# EAGLE board reveller-pi (EAGLE 7.5.0)
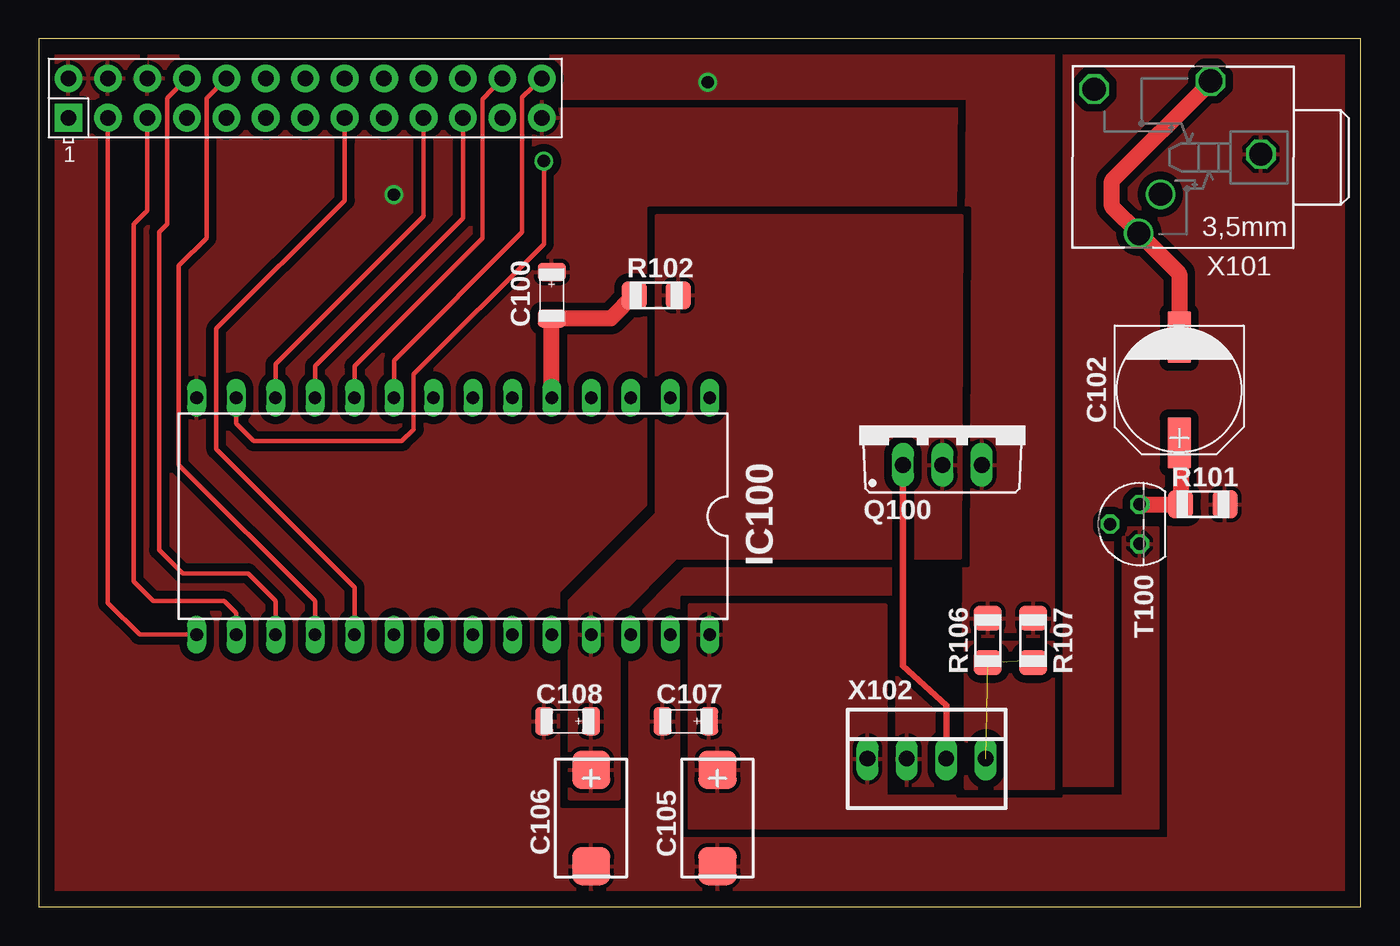
[diagram p0: board, top side]
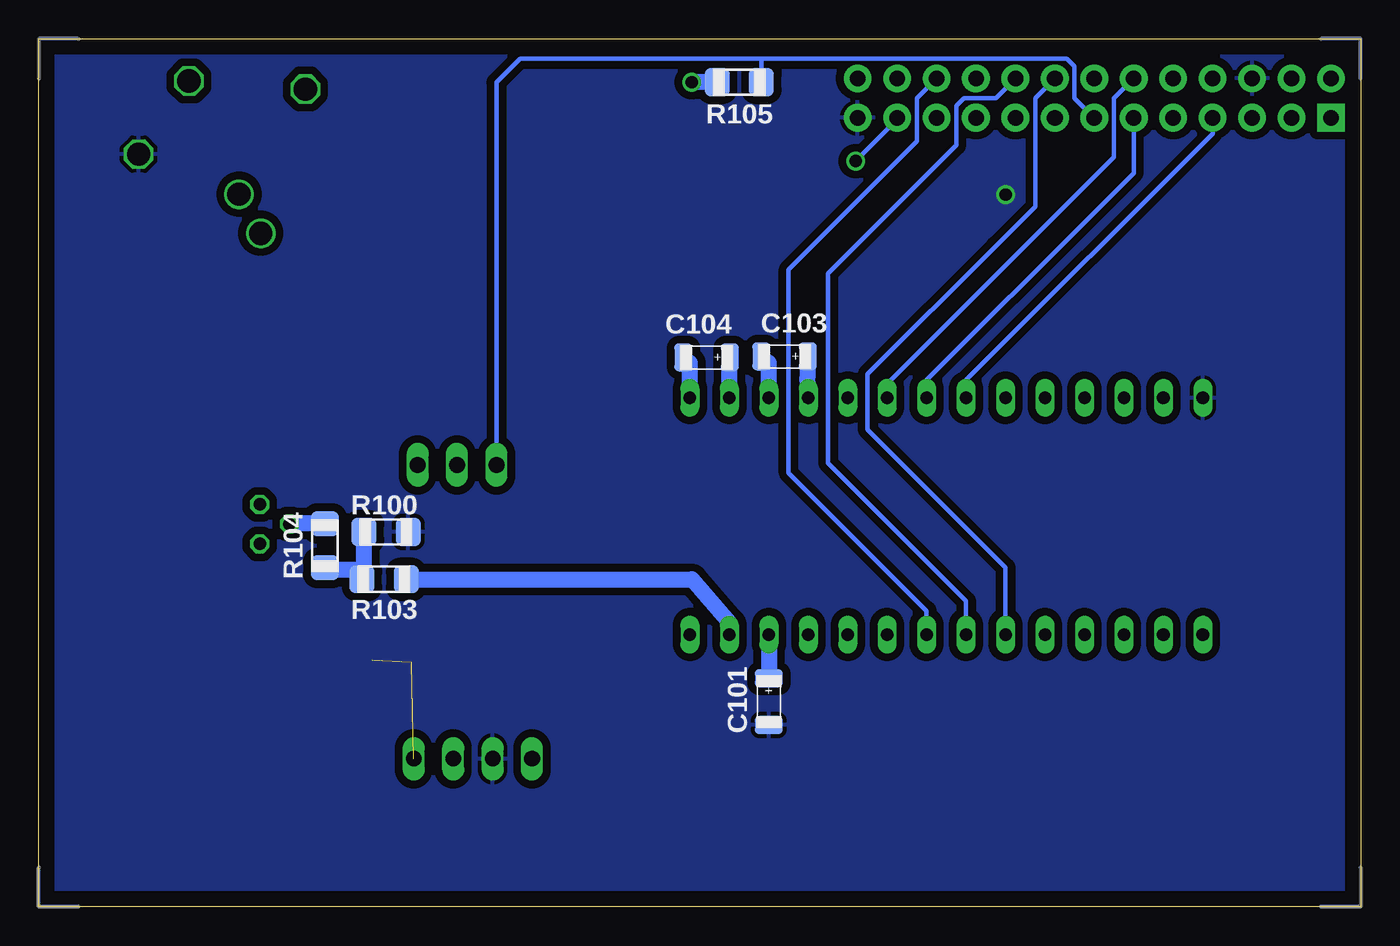
[diagram p1: board, bottom side, seen from below]

Size 85.09 x 55.88 mm. Coordinates in mm from the lower left corner, seen from the top.
Outline: 0,55.88 0,0 85.09,0 85.09,55.88 0,55.88
Copper layers (1*16): Top 0.035mm / dielectric 1.5mm / Bottom 0.035mm
Design rules "default *": minimum track width 0.25mm, minimum drill 0.8mm, track to track 0.5mm, track to pad 8mil, pad to pad 8mil, via to via 8mil, smd to smd 8mil, copper to edge 40mil, drill to drill 8mil, minimum pad ring 0.2mm, minimum via ring 8mil, stop-mask expansion 4mil, vias tented up to drill 0mil, thermal gap 10mil
Net classes: 0 default: clearance 0.205 mm; 1 data: width 0.3 mm, drill 0.8 mm
tKeepout: 4 lines

## Footprints (pad centres in the part's own frame; a part is rotated, then mirrored left to right if it is on the bottom)
SMD-IPC_C1206 = smd 1.15 x 1.8: + 1.5,0; - -1.5,0
PXE-H = smd 3.3 x 1.5: + 3.4,0; - -3.4,0
SMD-IPC_CT7343 = smd 2.45 x 2.45: + -3.1,0; - 3.1,0
DIL28-6 = drill 0.813 long: 1 -16.51,-7.62; 2 -13.97,-7.62; 3 -11.43,-7.62; 4 -8.89,-7.62; 5 -6.35,-7.62; 6 -3.81,-7.62; 7 -1.27,-7.62; 8 1.27,-7.62; 9 3.81,-7.62; 10 6.35,-7.62; 11 8.89,-7.62; 12 11.43,-7.62; 13 13.97,-7.62; 14 16.51,-7.62; 15 16.51,7.62; 16 13.97,7.62; 17 11.43,7.62; 18 8.89,7.62; 19 6.35,7.62; 20 3.81,7.62; 21 1.27,7.62; 22 -1.27,7.62; 23 -3.81,7.62; 24 -6.35,7.62; 25 -8.89,7.62; 26 -11.43,7.62; 27 -13.97,7.62; 28 -16.51,7.62
TO220BV = drill 1.016 long: D 0,-2.54; G -2.54,-2.54; S 2.54,-2.54
SMD-IPC_R1206 = smd 1.6 x 1.803: 1 -1.422,0; 2 1.422,0
TO92 = drill 0.813 octagon: 1 1.27,0; 2 0,1.905; 3 -1.27,0
RASPI_BOARD_AB_EDGES_0DRILL = drill 1 pad 1.778 square: 1 1.905,50.8 | drill 1 pad 1.778: 2 1.905,53.34; 3 4.445,50.8; 4 4.445,53.34; 5 6.985,50.8; 6 6.985,53.34; 7 9.525,50.8; 8 9.525,53.34; 9 12.065,50.8; 10 12.065,53.34; 11 14.605,50.8; 12 14.605,53.34; 13 17.145,50.8; 14 17.145,53.34; 15 19.685,50.8; 16 19.685,53.34; 17 22.225,50.8; 18 22.225,53.34; 19 24.765,50.8; 20 24.765,53.34; 21 27.305,50.8; 22 27.305,53.34; 23 29.845,50.8; 24 29.845,53.34; 25 32.385,50.8; 26 32.385,53.34
PG203J = drill 1.499 octagon: 1 -5.004,-0.203; 4 5.74,-4.369; 5 -1.753,-4.902 | drill 1.499: 2 2.845,4.902; 3 1.448,2.388
22-23-2041 = drill 1 long: 1 -3.81,0; 2 -1.27,0; 3 1.27,0; 4 3.81,0

## Placement (x,y rotation side)
C100  100nF  [SMD-IPC_C1206]  33.02,39.37 90 top
C101  1nF  [SMD-IPC_C1206]  38.1,13.21 90 bottom
C102  1uF  [PXE-H]  73.41,33.27 270 top
C103  470pF  [SMD-IPC_C1206]  37.08,35.43 0 bottom
C104  470pF  [SMD-IPC_C1206]  42.1,35.37 0 bottom
C105  10uF  [SMD-IPC_CT7343]  43.69,5.71 270 top
C106  10uF  [SMD-IPC_CT7343]  35.56,5.71 270 top
C107  100nF  [SMD-IPC_C1206]  41.66,11.94 0 top
C108  100nF  [SMD-IPC_C1206]  34.04,11.94 0 top
IC100  6581  [DIL28-6]  26.67,25.15 180 top
Q100  IRF9Z24N  [TO220BV]  58.17,30.99 0 top
R100  1K  [SMD-IPC_R1206]  62.74,24.13 180 bottom
R101  1k  [SMD-IPC_R1206]  74.93,25.91 0 top
R102  3.3k  [SMD-IPC_R1206]  39.75,39.37 0 top
R103  0R  [SMD-IPC_R1206]  62.87,21.08 180 bottom
R104  10K  [SMD-IPC_R1206]  66.67,23.24 90 bottom
R105  NM*  [SMD-IPC_R1206]  40.01,53.09 180 bottom
R106  4.7  [SMD-IPC_R1206]  61.09,17.14 90 top
R107  4.7  [SMD-IPC_R1206]  64.01,17.14 90 top
T100  BC547  [TO92]  70.87,24.64 90 top
X100  RASPI_BOARD_AB_E0  [RASPI_BOARD_AB_EDGES_0DRILL]  0,0 0 top
X101  PG203J  [PG203J]  73.66,48.26 179.9 top
X102  CANTON-POWER  [22-23-2041]  57.15,9.53 0 top

## Library data of the parts
C100-C108 = cyviz
IC100 = ic-package
Q100 = transistor-power
R100-R107 = cyviz; SIZE: 1206
T100 = transistor
X100 = raspberrypi_bastelstube_v13
X101 = con-hirschmann; OC_FARNELL: unknown; OC_NEWARK: unknown
X102 = con-molex; MF: MOLEX; MPN: 22-23-2041; OC_FARNELL: 1462920; OC_NEWARK: 38C0355

## Nets
3V3: X100.1
+5V: Q100.S R105.2 R106.2 R107.2 X100.2 X100.4
+5V_SID: C106.+ C108.+ IC100.25 Q100.D R102.2
+12V: C105.+ C107.+ IC100.28 T100.3 X102.1
A0 [data]: IC100.9 X100.26
A1 [data]: IC100.10 X100.24
A2 [data]: IC100.11 X100.21
A3 [data]: IC100.12 X100.19
A4 [data]: IC100.13 X100.23
AUDIO_DC: C102.+ R101.1 T100.1
AUDIO_OUT: C102.- X101.2 X101.5
AUDIO_PREAMP: R100.2 R103.2 R104.1
AUDIO_PREAMP_B: R104.2 T100.2
AUDIO_RAW: IC100.27 R103.1
CAP1A: C104.- IC100.1
CAP1B: C104.+ IC100.2
CAP2A: C103.- IC100.3
CAP2B: C103.+ IC100.4
CAPX: C101.+ IC100.26
CLK [data]: IC100.6 X100.12
CS [data]: IC100.8 X100.7
D0 [data]: IC100.15 X100.3
D1 [data]: IC100.16 X100.5
D2 [data]: IC100.17 X100.8
D3 [data]: IC100.18 X100.10
D4 [data]: IC100.19 X100.15
D5 [data]: IC100.20 X100.16
D6 [data]: IC100.21 X100.18
D7 [data]: IC100.22 X100.22
GND: C100.+ C101.- C105.- C106.- C107.- C108.- IC100.14 R100.1 R101.2 X100.6 X100.25 X101.1 X102.2
N$1: R106.1 R107.1 X102.4
PWCTL [data]: Q100.G R105.1 X100.13 X102.3
RESET: C100.- IC100.5 R102.1
RW [data]: IC100.7 X100.11

## Tracks (layer width: path | path; a pad name or v marks a point on that pad's centre or on a via)
+5V  (via drill 0.8)
  Bottom 1.016: R105.2 v43.05,53.09
  pour Top (rank 5): 0,55.88 65.28,55.88 65.28,17.4 59.56,17.4 59.82,52.07 33.78,52.07 33.78,54.1 6.99,54.1 6.99,52.07 0,52.07
+5V_SID
  pour Top (rank 4): 34.16,19.68 34.16,6.99 37.34,6.99 37.34,18.8 41.02,22.48 59.31,22.48 59.44,44.45 39.75,44.45 39.75,25.27
+12V
  pour Top (rank 2): 41.91,19.43 54.48,19.43 54.48,7.11 69.85,7.11 69.85,24.38 72.01,24.38 72.01,5.08 41.91,5.08
A0
  Top 0.3: X100.26 31.11,52.13 31.11,48.77 31.11,48.01 31.11,43.43 22.86,35.18 IC100.9
A1
  Top 0.3: X100.24 28.57,52.01 28.57,48.39 28.57,47.24 28.57,43.05 20.32,34.8 IC100.10
A2
  Top 0.3: IC100.11 17.78,34.8 27.3,44.32 27.3,48.26 27.3,49.66 X100.21
A3
  Top 0.3: X100.19 24.77,49.78 24.77,47.37 24.77,44.45 15.24,34.92 IC100.12
A4  (via drill 0.8)
  Top 0.3: IC100.13 12.7,31.11 13.84,29.97 23.37,29.97 24.13,30.73 24.13,34.29 32.51,42.67 32.51,47.88 v32.51,48.01
  Bottom 0.3: v32.51,48.01 29.84,50.67 X100.23
AUDIO_DC
  Top 1.016: T100.1 R101.1 73.51,29.87 C102.+
AUDIO_OUT
  Top 1.016: C102.- 73.41,40.76 X101.2 69.09,45.08 69.09,46.74 75.42,53.07 X101.5
AUDIO_PREAMP
  Bottom 1.016: R103.2 64.16,21.72 | 64.16,21.72 R100.2 | R104.1 66.57,21.72 64.16,21.72
AUDIO_PREAMP_B
  Bottom 1.016: R104.2 68.96,24.66 T100.2
AUDIO_RAW
  Bottom 1.016: R103.1 43.05,21.08 40.64,18.29 IC100.27
CAP1A
  Bottom 1.016: IC100.1 43.18,35.01 C104.-
CAP1B
  Bottom 1.016: IC100.2 40.64,34.89 C104.+
CAP2A
  Bottom 1.016: IC100.3 38.1,35.01 C103.-
CAP2B
  Bottom 1.016: IC100.4 35.6,34.16 35.6,35.05 C103.+
CAPX
  Bottom 1.016: IC100.26 C101.+
CLK
  Bottom 0.3: X100.12 15.88,52.07 15.88,48.51 15.88,48.39 15.88,48.26 30.48,33.66 IC100.6
CS
  Bottom 0.3: IC100.8 25.4,33.91 9.53,49.78 9.53,50.42 9.53,50.04 X100.7
D0
  Top 0.3: X100.3 4.45,19.56 6.48,17.53 IC100.15
D1
  Top 0.3: IC100.16 12.7,18.92 11.94,19.68 7.37,19.68 6.1,20.95 6.1,43.94 6.99,44.83 X100.5
D2
  Top 0.3: X100.8 8.26,52.07 8.26,49.02 8.26,46.61 8.26,43.94 7.75,43.43 7.75,22.99 9.27,21.46 13.46,21.46 15.24,19.68 IC100.17
D3
  Top 0.3: X100.10 10.79,52.07 10.79,48.39 10.79,46.86 10.79,43.05 9.02,41.27 9.02,28.45 17.78,19.68 IC100.18
D4
  Top 0.3: IC100.19 20.32,20.57 11.43,29.46 11.43,37.21 19.68,45.47 19.68,49.28 X100.15
D5
  Bottom 0.3: X100.16 20.95,52.07 20.95,51.44 20.95,45.09 23.5,42.55 31.75,34.29 31.75,30.73 22.86,21.84 IC100.20
D6
  Bottom 0.3: X100.18 23.5,52.07 25.53,52.07 26.04,51.56 26.04,49.02 34.29,40.77 34.29,28.57 25.4,19.68 IC100.21
D7
  Bottom 0.3: X100.22 28.57,52.07 28.57,49.28 36.83,41.02 36.83,27.94 27.94,19.05 IC100.22
GND  (via drill 0.8)
  other vias: 22.86,45.85
  pour Top (rank 6): 0,0 85.09,0 85.09,55.88 0,55.88
  pour Bottom (rank 6): 0,0 85.09,0 85.09,55.88 0,55.88
N$1  (2 unrouted)
  Top 0.406: R107.1 63.63,15.85 | R106.1 60.96,15.85
N$2
  pour Top: 59.69,17.02 65.28,17.02 65.28,7.62 59.69,7.62
PWCTL
  Top 0.406: Q100.G 55.63,15.49 58.42,12.95 X102.3
  Bottom 0.3: 38.58,54.61 54.1,54.61 55.63,53.09 55.63,28.83 | 38.58,54.61 18.92,54.61 18.41,54.1 18.41,52.07 X100.13 | R105.1 38.58,54.61
  Bottom 0.305: 55.63,28.83 Q100.G
RESET
  Top 1.016: IC100.5 C100.- 36.83,37.87 R102.1
RW
  Bottom 0.3: IC100.7 27.94,33.91 17.14,44.7 14.61,47.24 14.61,50.16 X100.11

## Text on the board
tStop: 5V | 5V_SID | 12V | Reveller / Sid Player / #FluXxX / V0.2 | GND
bStop: Reveller / Sid Player / #FluXxX / V0.2 | GND
tCream: 5V | 5V_SID | 12V | Reveller / Sid Player / #FluXxX / V0.2 | GND
bCream: Reveller / Sid Player / #FluXxX / V0.2 | GND